# Altium PCB Board_v1.2.PcbDoc
Units mm, origin at the board's own origin, x right, y up, seen from the top; angles counter-clockwise.
Board outline 50 x 30 mm, 4 copper layers (Top Layer, Int1 (signal), Int2 (GND), Bottom Layer), stack 1.369 mm thick; 76 components, 45 nets, 255 pads, 194 vias.
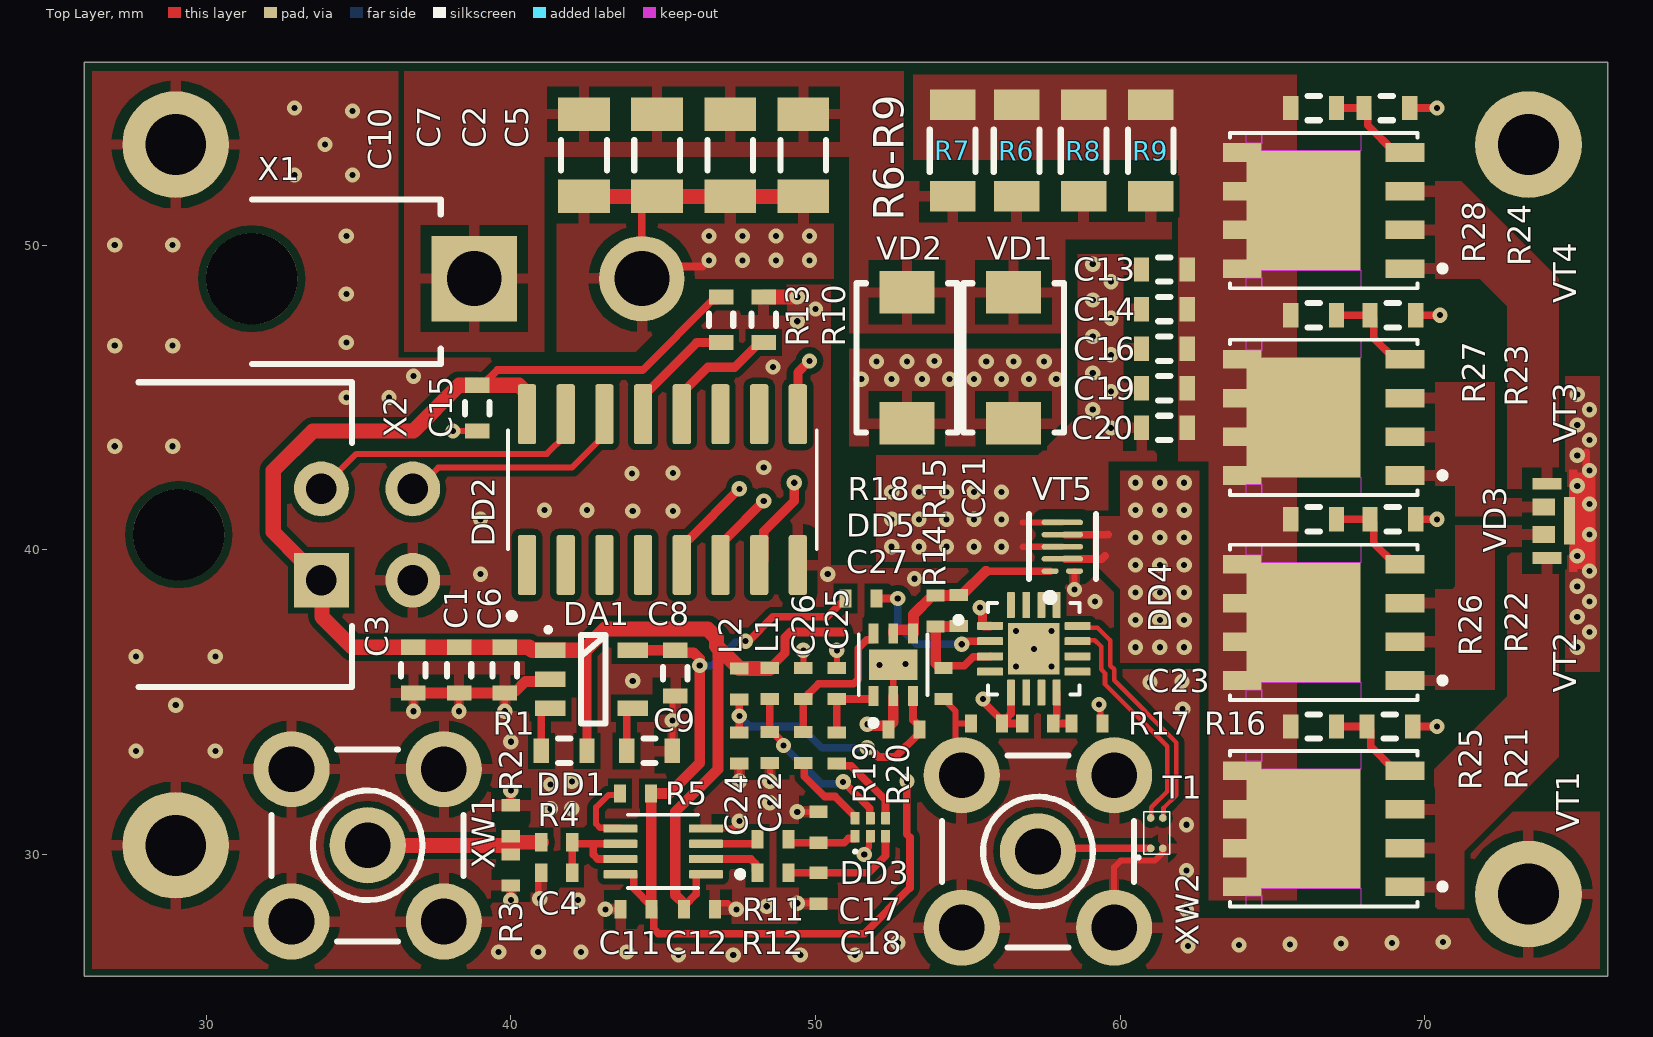
[diagram p0: Top Layer view]
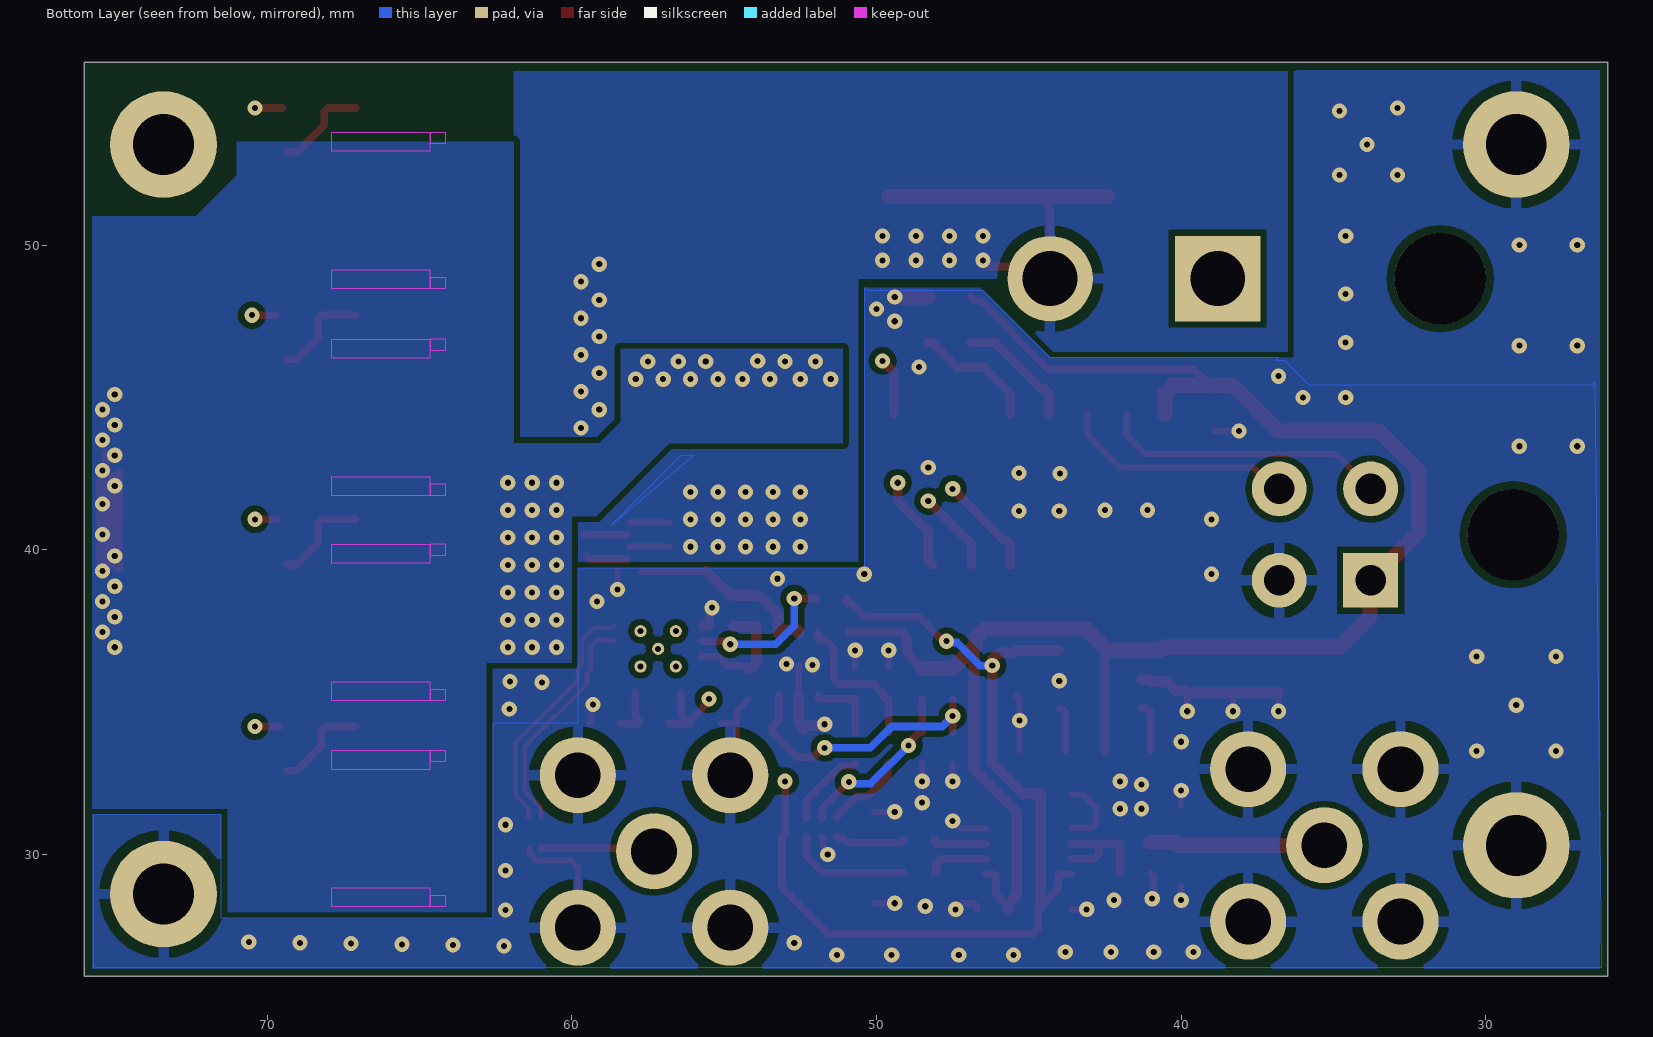
[diagram p1: Bottom Layer view, seen from below]
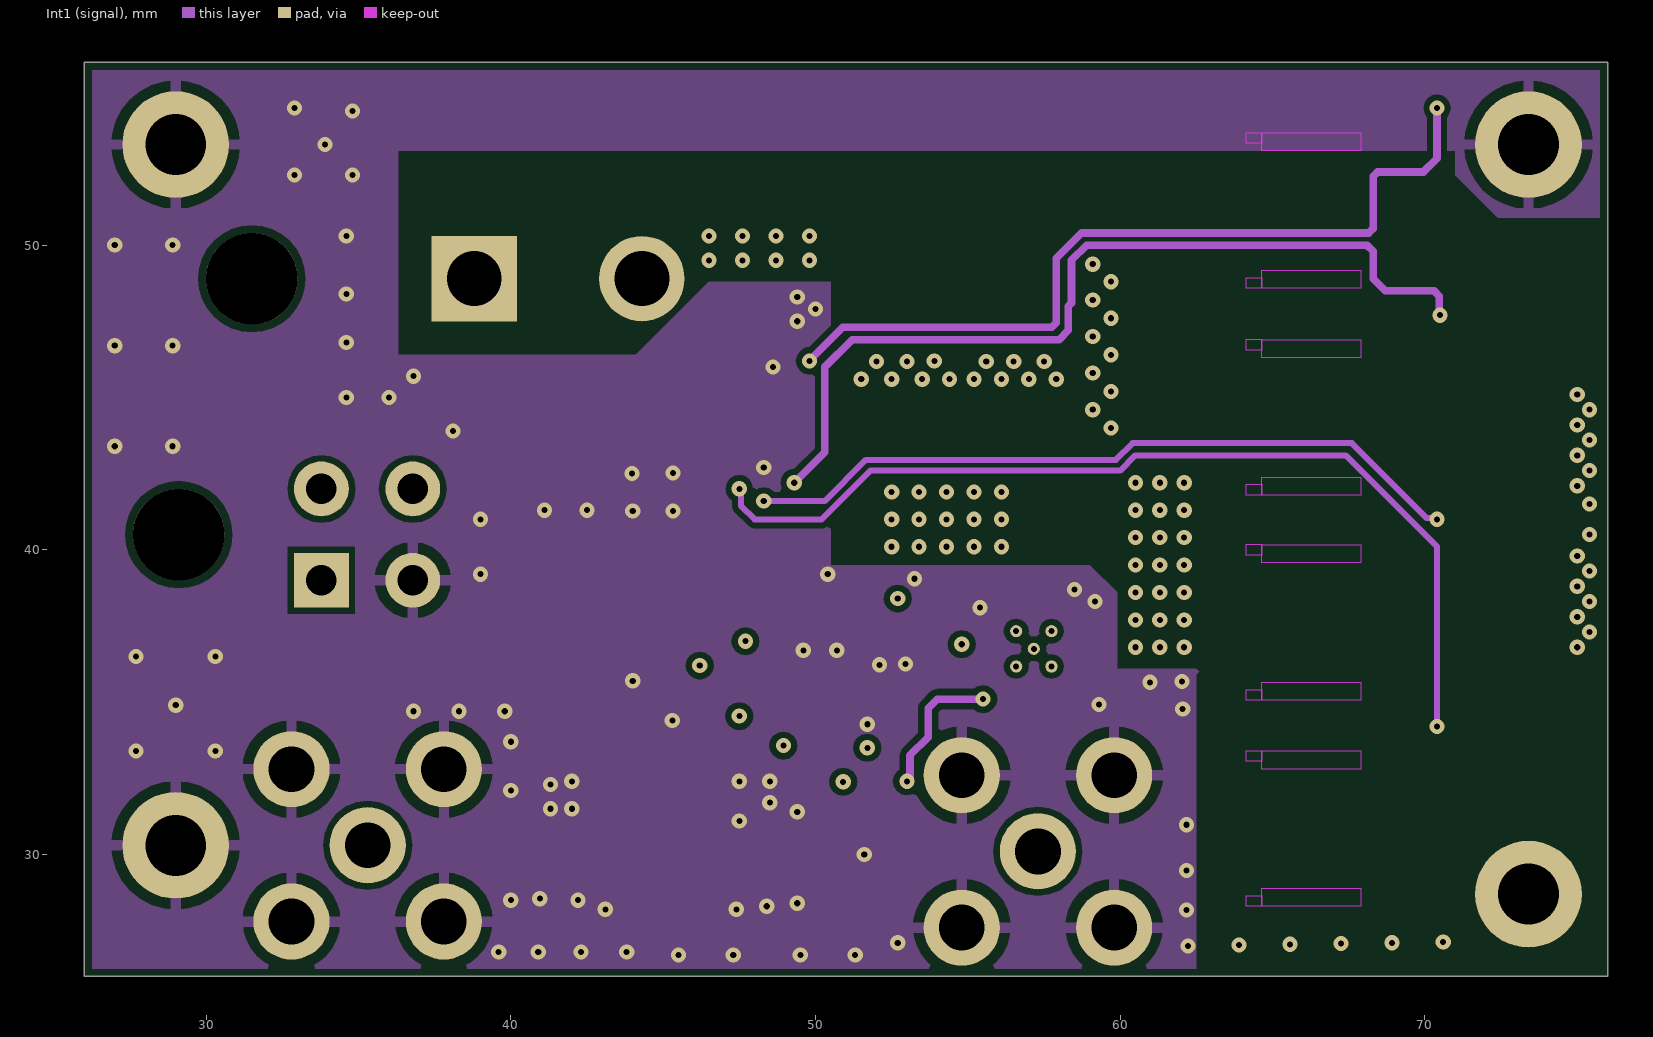
[diagram p2: Int1 (signal)]
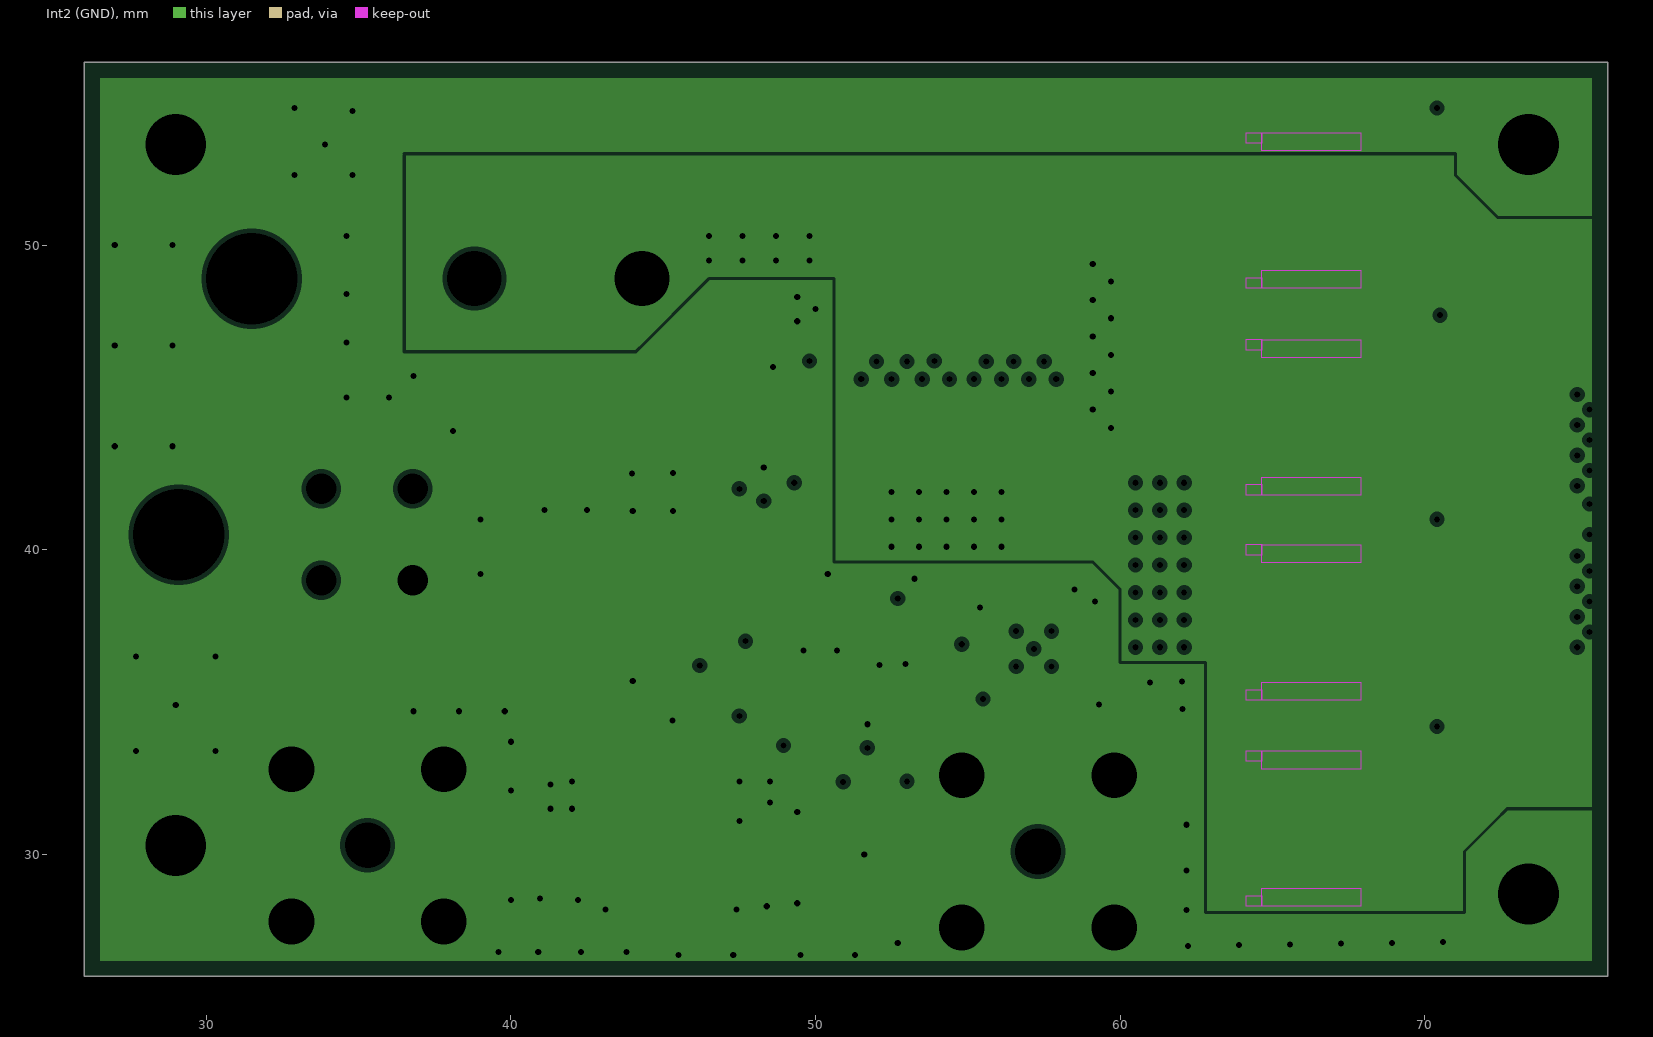
[diagram p3: Int2 (GND), clearances drawn from the general rule]
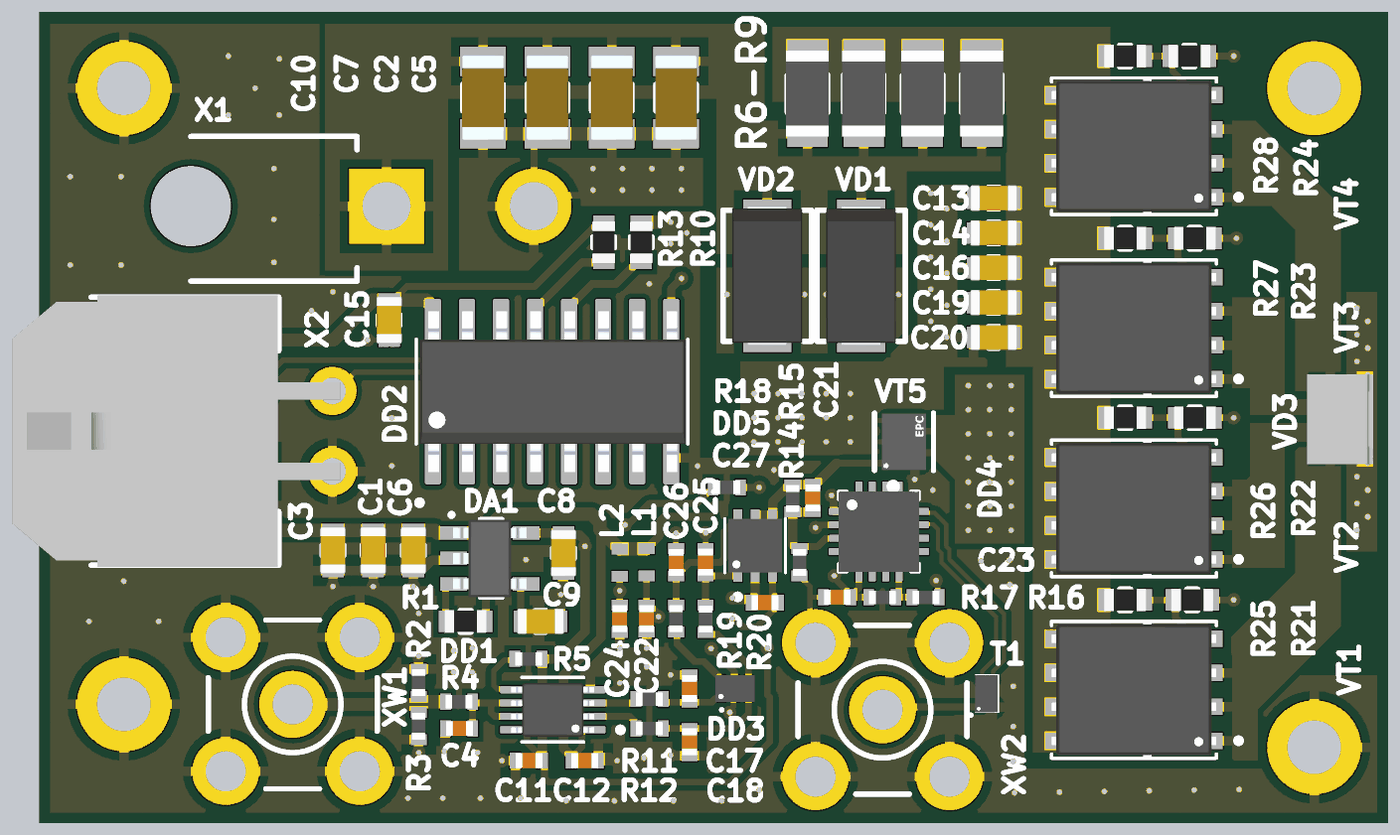
[diagram p4: 3D render of the assembled board from above, using the file's embedded part models]

## Layer stack, top to bottom
Top Solder: solder mask 0.0254, SM-001, Dk 4
Top Layer: signal copper 0.035
Dielectric 1: prepreg 0.1295, PP-017, Dk 4.3
Dielectric 2: prepreg 0.1295, PP-017, Dk 4.3
Int1 (signal): signal copper 0.035
Dielectric 3: core 0.7112, Core-039, Dk 4.8
Int2 (GND): plane copper 0.035, net (Multiple Nets)
Dielectric 4: prepreg 0.1295, PP-017, Dk 4.3
Dielectric 5: prepreg 0.1295, PP-017, Dk 4.3
Bottom Layer: signal copper 0.035
Bottom Solder: solder mask 0.0254, SM-001, Dk 4

## Board outline
26,26 76,26 76,56 26,56

## Design rules (kind name [scope] priority, off if disabled: settings)
AcuteAngle [All] p1: minimum=3.50000000000000E+0001 checktracksonly=FALSE
BoardOutlineClearance "BoardOutlineClearance 1" [All] p1: gap=0.25 ignorepadtopadclearanceinfootprint=FALSE except(0: Arc-SplitContinuation Track-SplitContinuation SMDPad-SplitContinuation THPad-SplitContinuation Via-SplitContinuation Fill-SplitContinuation Poly-SplitContinuation Region-SplitContinuation Text-SplitContinuation) // Milling
BoardOutlineClearance "BoardOutlineClearance 2" [All] p2: gap=0.4 ignorepadtopadclearanceinfootprint=FALSE except(0: Arc-SplitContinuation Track-SplitContinuation SMDPad-SplitContinuation THPad-SplitContinuation Via-SplitContinuation Fill-SplitContinuation Poly-SplitContinuation Region-SplitContinuation Text-SplitContinuation) // V-Cut
Clearance "Clearance-1 1 Oz" [All] p1 off: gap=0.2 ignorepadtopadclearanceinfootprint=FALSE except(0.25: Arc-Hole Track-Hole SMDPad-Hole THPad-Hole Via-Hole Fill-Hole Poly-Hole Region-Hole Text-Hole) // Standart
Clearance "Clearance 3 Oz" [All] p2 off: gap=0.35 ignorepadtopadclearanceinfootprint=FALSE except(0.25: Arc-Hole Track-Hole SMDPad-Hole THPad-Hole Via-Hole Fill-Hole Poly-Hole Region-Hole Text-Hole)
Clearance "Clearance 2 Oz" [All] p3 off: gap=0.3 ignorepadtopadclearanceinfootprint=FALSE except(0.25: Arc-Hole Track-Hole SMDPad-Hole THPad-Hole Via-Hole Fill-Hole Poly-Hole Region-Hole Text-Hole)
Clearance "Clearance-2 1 Oz" [All] p4: gap=0.15 ignorepadtopadclearanceinfootprint=FALSE except(0.2: Arc-Fill Arc-Poly Track-Fill Track-Poly SMDPad-Fill SMDPad-Poly THPad-Fill THPad-Poly Via-Fill Via-Poly Fill-Fill Fill-Poly Poly-Poly; 0.25: Arc-Hole Track-Hole SMDPad-Hole THPad-Hole Via-Hole Fill-Hole Poly-Hole Region-Hole Text-Hole) // Advance
Clearance "Clearance-1 1/2 Oz" [All] p5: gap=0.125 ignorepadtopadclearanceinfootprint=FALSE except(0.2: Arc-Fill Arc-Poly Track-Fill Track-Poly SMDPad-SMDPad SMDPad-Fill SMDPad-Poly THPad-Fill THPad-Poly Via-Fill Via-Poly Fill-Fill Fill-Poly Poly-Poly Poly-Region Poly-Text; 0.25: Arc-Hole Track-Hole SMDPad-Hole THPad-Hole Via-Hole Fill-Hole Poly-Hole Region-Hole Text-Hole) // Standart
Clearance "Clearance-2 1/2 Oz" [All] p6: gap=0.1 ignorepadtopadclearanceinfootprint=FALSE except(0.15: Arc-Fill Arc-Poly Track-Fill Track-Poly SMDPad-SMDPad SMDPad-Fill SMDPad-Poly THPad-Fill THPad-Poly Via-Fill Via-Poly Fill-Fill Fill-Poly Poly-Poly Poly-Region Poly-Text; 0.25: Arc-Hole Track-Hole SMDPad-Hole THPad-Hole Via-Hole Fill-Hole Poly-Hole Region-Hole Text-Hole) // Advance
ComponentClearance [All] p1 off: gap=0.254 collisioncheckmode=3 verticalgap=0.254 showdistances=FALSE
DiffPairsRouting DiffPair_USBDiffPairsRouting [InDifferentialPair ('USB2_C_D') Or InDifferentialPair ('USB2_D') Or InDifferentialPair ('USB1_D') Or InDifferentialPair ('USB1_C_D')] p1: maxlimit=0.269 minlimit=0.15 mostfreqgap=0.178 toplayer_maxgap=0.254 toplayer_prefgap=0.15 toplayer_minwidth=0.15 toplayer_maxwidth=0.381 toplayer_prefwidth=0.187 midlayer1_mingap=0.163 midlayer1_minwidth=0.15 midlayer1_maxwidth=0.381 midlayer1_prefwidth=0.15 bottomlayer_maxgap=0.254 bottomlayer_prefgap=0.15 bottomlayer_minwidth=0.167 bottomlayer_maxwidth=0.381 bottomlayer_prefwidth=0.187 impedanceprofiledriven=TRUE maxuncoupledlength=12.7
DiffPairsRouting DiffPair_GbEthDiffPairsRouting [InDifferentialPair ('PCIE0_TX0') Or InDifferentialPair ('PCIE0_TX1') Or InDifferentialPair ('PCIE0_RX2') Or InDifferentialPair ('PCIE0_RX3') Or InDifferentialPair ('PCIE0_RX0') Or InDifferentialPair ('PCIE0_RX1') Or InDifferentialPair ('C_PCIE0_TX3') Or InDifferentialPair ('PCIE0_CLK') Or InDifferentialPair ('C_PCIE0_TX1') Or InDifferentialPair ('C_PCIE0_TX2') Or InDifferentialPair ('C_PCIE0_TX0') Or InDifferentialPair ('PCIE0_TX2') Or InDifferentialPair ('PCIE0_TX3')] p2: maxlimit=0.269 minlimit=0.15 mostfreqgap=0.15 toplayer_maxgap=0.254 toplayer_minwidth=0.15 toplayer_maxwidth=0.381 toplayer_prefwidth=0.235 midlayer1_minwidth=0.15 midlayer1_maxwidth=0.381 midlayer1_prefwidth=0.183 bottomlayer_maxgap=0.254 bottomlayer_minwidth=0.167 bottomlayer_maxwidth=0.381 bottomlayer_prefwidth=0.235 impedanceprofiledriven=TRUE maxuncoupledlength=12.7
DiffPairsRouting DiffPair_PCIeDiffPairsRouting [InDifferentialPair ('PCIE0_TX0') Or InDifferentialPair ('PCIE0_TX1') Or InDifferentialPair ('PCIE0_RX1') Or InDifferentialPair ('PCIE0_RX0') Or InDifferentialPair ('PCIE0_TX3') Or InDifferentialPair ('PCIE0_RX2') Or InDifferentialPair ('PCIE0_CLK') Or InDifferentialPair ('PCIE0_TX2') Or InDifferentialPair ('PCIE0_RX3')] p3: maxlimit=0.269 minlimit=0.15 mostfreqgap=0.15 toplayer_maxgap=0.254 toplayer_minwidth=0.15 toplayer_maxwidth=0.381 toplayer_prefwidth=0.235 midlayer1_minwidth=0.15 midlayer1_maxwidth=0.381 midlayer1_prefwidth=0.183 bottomlayer_maxgap=0.254 bottomlayer_minwidth=0.15 bottomlayer_maxwidth=0.381 bottomlayer_prefwidth=0.235 impedanceprofiledriven=TRUE maxuncoupledlength=12.7
DiffPairsRouting DiffPair_CSI_2DiffPairsRouting [InDifferentialPair ('CSI_E_CLK') Or InDifferentialPair ('CSI_E_D1') Or InDifferentialPair ('CSI_F_D0') Or InDifferentialPair ('CSI_F_D1') Or InDifferentialPair ('CSI_E_D0')] p4: maxlimit=0.254 minlimit=0.15 mostfreqgap=0.178 toplayer_prefgap=0.15 toplayer_minwidth=0.125 toplayer_maxwidth=0.381 toplayer_prefwidth=0.187 midlayer1_minwidth=0.098 midlayer1_maxwidth=0.381 midlayer1_prefwidth=0.15 bottomlayer_prefgap=0.15 bottomlayer_minwidth=0.125 bottomlayer_maxwidth=0.381 bottomlayer_prefwidth=0.187 impedanceprofiledriven=TRUE maxuncoupledlength=12.7
DiffPairsRouting DiffPair_CSI_1DiffPairsRouting [InDifferentialPair ('CSI_A_D0') Or InDifferentialPair ('CSI_B_D1') Or InDifferentialPair ('CSI_A_CLK') Or InDifferentialPair ('CSI_A_D1') Or InDifferentialPair ('CSI_B_D0')] p5: maxlimit=0.254 minlimit=0.15 mostfreqgap=0.178 toplayer_prefgap=0.15 toplayer_minwidth=0.15 toplayer_maxwidth=0.381 toplayer_prefwidth=0.187 midlayer1_minwidth=0.15 midlayer1_maxwidth=0.381 midlayer1_prefwidth=0.15 bottomlayer_prefgap=0.15 bottomlayer_minwidth=0.15 bottomlayer_maxwidth=0.381 bottomlayer_prefwidth=0.187 impedanceprofiledriven=TRUE maxuncoupledlength=12.7
DiffPairsRouting DiffPair_GbEDiffPairsRouting [InDifferentialPairClass('GbE')] p6: maxlimit=0.269 minlimit=0.15 mostfreqgap=0.221 toplayer_maxgap=0.254 toplayer_prefgap=0.206 toplayer_minwidth=0.15 toplayer_maxwidth=0.381 toplayer_prefwidth=0.15 midlayer1_minwidth=0.15 midlayer1_maxwidth=0.381 midlayer1_prefwidth=0.15 bottomlayer_maxgap=0.254 bottomlayer_prefgap=0.15 bottomlayer_minwidth=0.15 bottomlayer_maxwidth=0.381 bottomlayer_prefwidth=0.167 impedanceprofiledriven=TRUE maxuncoupledlength=12.7
DiffPairsRouting DiffPair_TMDS_1DiffPairsRouting [InDifferentialPair ('TMDS_D0_C') Or InDifferentialPair ('TMDS_D1_C') Or InDifferentialPair ('TMDS_D2_C') Or InDifferentialPair ('TMDS_CLK_C')] p7: maxlimit=0.269 minlimit=0.15 mostfreqgap=0.221 toplayer_maxgap=0.254 toplayer_prefgap=0.206 toplayer_minwidth=0.15 toplayer_maxwidth=0.381 toplayer_prefwidth=0.15 midlayer1_minwidth=0.15 midlayer1_maxwidth=0.381 midlayer1_prefwidth=0.15 bottomlayer_maxgap=0.254 bottomlayer_prefgap=0.15 bottomlayer_minwidth=0.15 bottomlayer_maxwidth=0.381 bottomlayer_prefwidth=0.167 impedanceprofiledriven=TRUE maxuncoupledlength=12.7
DiffPairsRouting CSI [InDifferentialPairClass('CSI')] p8: maxlimit=0.254 minlimit=0.15 mostfreqgap=0.178 toplayer_prefgap=0.15 toplayer_minwidth=0.187 toplayer_maxwidth=0.381 toplayer_prefwidth=0.187 midlayer1_minwidth=0.117 midlayer1_maxwidth=0.381 midlayer1_prefwidth=0.15 bottomlayer_prefgap=0.15 bottomlayer_minwidth=0.187 bottomlayer_maxwidth=0.381 bottomlayer_prefwidth=0.187 impedanceprofiledriven=TRUE maxuncoupledlength=12.7
DiffPairsRouting GBE [InDifferentialPairClass('GbE')] p9: maxlimit=0.269 minlimit=0.15 mostfreqgap=0.221 toplayer_maxgap=0.254 toplayer_prefgap=0.206 toplayer_minwidth=0.125 toplayer_maxwidth=0.381 toplayer_prefwidth=0.15 midlayer1_minwidth=0.098 midlayer1_maxwidth=0.381 midlayer1_prefwidth=0.15 bottomlayer_maxgap=0.254 bottomlayer_prefgap=0.15 bottomlayer_minwidth=0.125 bottomlayer_maxwidth=0.381 bottomlayer_prefwidth=0.167 impedanceprofiledriven=TRUE maxuncoupledlength=12.7
DiffPairsRouting TMDS [InDifferentialPairClass('TMDS')] p10: maxlimit=0.269 minlimit=0.127 mostfreqgap=0.221 toplayer_maxgap=0.254 toplayer_prefgap=0.206 toplayer_minwidth=0.125 toplayer_maxwidth=0.381 toplayer_prefwidth=0.15 midlayer1_minwidth=0.07 midlayer1_maxwidth=0.381 midlayer1_prefwidth=0.15 bottomlayer_maxgap=0.254 bottomlayer_prefgap=0.15 bottomlayer_minwidth=0.125 bottomlayer_maxwidth=0.381 bottomlayer_prefwidth=0.167 impedanceprofiledriven=TRUE maxuncoupledlength=12.7
DiffPairsRouting "DiffPairsRouting 1 Oz" [All] p11 off: maxlimit=0.254 minlimit=0.2 mostfreqgap=0.254 toplayer_minwidth=0.2 toplayer_maxwidth=0.381 toplayer_prefwidth=0.381 midlayer1_minwidth=0.2 midlayer1_maxwidth=0.381 midlayer1_prefwidth=0.381 bottomlayer_minwidth=0.2 bottomlayer_maxwidth=0.381 bottomlayer_prefwidth=0.381 maxuncoupledlength=12.7
DiffPairsRouting "DiffPairsRouting 1/2 Oz" [All] p12 off: maxlimit=0.254 minlimit=0.1 mostfreqgap=0.254 toplayer_minwidth=0.1 toplayer_maxwidth=0.381 toplayer_prefwidth=0.381 midlayer1_minwidth=0.1 midlayer1_maxwidth=0.381 midlayer1_prefwidth=0.381 bottomlayer_minwidth=0.1 bottomlayer_maxwidth=0.381 bottomlayer_prefwidth=0.381 maxuncoupledlength=12.7
HoleSize "Minimum HoleSize" [IsPad] p1: absolutevalues=TRUE maxlimit=5.9 minlimit=0.6 maxpercent=80.000 minpercent=20.000
HoleSize "Minimum HoleSize VIA 1" [IsVia] p2: absolutevalues=TRUE maxlimit=5.9 minlimit=0.3 maxpercent=80.000 minpercent=20.000 // Standart
HoleSize "Minimum HoleSize VIA 2" [IsVia] p3: absolutevalues=TRUE maxlimit=5.9 minlimit=0.2 maxpercent=80.000 minpercent=20.000 // Advance
HoleToHoleClearance Hole2HoleClearance [All] p1: gap=0.25 allowstackedmicrovias=FALSE
MatchedLengths DiffPair_USBMatchedLengths [InDifferentialPair ('USB2_C_D') Or InDifferentialPair ('USB2_D') Or InDifferentialPair ('USB1_D') Or InDifferentialPair ('USB1_C_D')] p1: tolerance=0.65 checknetsindiffpair=FALSE checkdiffpairvsdiffpair=TRUE checkxsignals=TRUE checkothers=TRUE
MatchedLengths DiffPair_GbEthMatchedLengths [InDifferentialPair ('PCIE0_TX0') Or InDifferentialPair ('PCIE0_TX1') Or InDifferentialPair ('PCIE0_RX2') Or InDifferentialPair ('PCIE0_RX3') Or InDifferentialPair ('PCIE0_RX0') Or InDifferentialPair ('PCIE0_RX1') Or InDifferentialPair ('C_PCIE0_TX3') Or InDifferentialPair ('PCIE0_CLK') Or InDifferentialPair ('C_PCIE0_TX1') Or InDifferentialPair ('C_PCIE0_TX2') Or InDifferentialPair ('C_PCIE0_TX0') Or InDifferentialPair ('PCIE0_TX2') Or InDifferentialPair ('PCIE0_TX3')] p2: tolerance=1 checknetsindiffpair=FALSE checkdiffpairvsdiffpair=TRUE checkxsignals=TRUE checkothers=TRUE
MatchedLengths DiffPair_PCIeMatchedLengths [InDifferentialPair ('PCIE0_TX0') Or InDifferentialPair ('PCIE0_TX1') Or InDifferentialPair ('PCIE0_RX1') Or InDifferentialPair ('PCIE0_RX0') Or InDifferentialPair ('PCIE0_TX3') Or InDifferentialPair ('PCIE0_RX2') Or InDifferentialPair ('PCIE0_CLK') Or InDifferentialPair ('PCIE0_TX2') Or InDifferentialPair ('PCIE0_RX3')] p3: tolerance=1 checknetsindiffpair=FALSE checkdiffpairvsdiffpair=TRUE checkxsignals=TRUE checkothers=TRUE
MatchedLengths DiffPair_CSI_2MatchedLengths [InDifferentialPair ('CSI_E_CLK') Or InDifferentialPair ('CSI_E_D1') Or InDifferentialPair ('CSI_F_D0') Or InDifferentialPair ('CSI_F_D1') Or InDifferentialPair ('CSI_E_D0')] p4: tolerance=1 checknetsindiffpair=FALSE checkdiffpairvsdiffpair=TRUE checkxsignals=TRUE checkothers=TRUE
MatchedLengths DiffPair_CSI_1MatchedLengths [InDifferentialPair ('CSI_A_D0') Or InDifferentialPair ('CSI_B_D1') Or InDifferentialPair ('CSI_A_CLK') Or InDifferentialPair ('CSI_A_D1') Or InDifferentialPair ('CSI_B_D0')] p5: tolerance=1 checknetsindiffpair=FALSE checkdiffpairvsdiffpair=TRUE checkxsignals=TRUE checkothers=TRUE
MatchedLengths DiffPair_GbEMatchedLengths [InDifferentialPairClass('GbE')] p6: tolerance=1 checknetsindiffpair=FALSE checkdiffpairvsdiffpair=TRUE checkxsignals=TRUE checkothers=TRUE
MatchedLengths DiffPair_TMDS_1MatchedLengths [InDifferentialPair ('TMDS_D0_C') Or InDifferentialPair ('TMDS_D1_C') Or InDifferentialPair ('TMDS_D2_C') Or InDifferentialPair ('TMDS_CLK_C')] p7: tolerance=1 checknetsindiffpair=FALSE checkdiffpairvsdiffpair=TRUE checkxsignals=TRUE checkothers=TRUE
MatchedLengths DiffPair_MatchedLengths [InDifferentialPair ('TMDS_CLK') Or InDifferentialPair ('TMDS_D0') Or InDifferentialPair ('TMDS_D1') Or InDifferentialPair ('TMDS_D2')] p8: tolerance=1 checknetsindiffpair=FALSE checkdiffpairvsdiffpair=TRUE checkxsignals=TRUE checkothers=TRUE
MatchedLengths [InDifferentialPairClass('TMDS')] p9: tolerance=1 checknetsindiffpair=FALSE checkdiffpairvsdiffpair=TRUE checkxsignals=TRUE checkothers=TRUE
MatchedLengths MatchedLengths_InParirs [All] p10: tolerance=0.1 checknetsindiffpair=TRUE checkdiffpairvsdiffpair=FALSE checkxsignals=FALSE checkothers=FALSE
MatchedLengths MatchedLengths_BetweenPairs [InDifferentialPairClass('GbE')] p11: tolerance=1 checknetsindiffpair=FALSE checkdiffpairvsdiffpair=TRUE checkxsignals=TRUE checkothers=TRUE
MinimumAnnularRing "Minimum AR VIA Standart" [IsVia] p1: minimumring=0.15
MinimumAnnularRing "Minimum AR PAD Standart" [IsPAD] p2: minimumring=0.2
MinimumAnnularRing "Minimum AR VIA Advance" [IsVia] p3: minimumring=0.1
MinimumAnnularRing "Minimum AR PAD Advance" [IsPAD] p4: minimumring=0.15
MinimumSolderMaskSliver "SolderMask Bridge Standart" [All] p1: minsoldermaskwidth=0.15 // All Masks
MinimumSolderMaskSliver "SolderMask Bridge Advance" [All] p2: minsoldermaskwidth=0.1 // Mask LDI
PlaneClearance "PlaneClearance 3 Oz" [All] p1: clearance=0.35
PlaneClearance "PlaneClearance 2 Oz" [All] p2: clearance=0.3
PlaneClearance "PlaneClearance 1 Oz" [All] p3: clearance=0.2
PlaneClearance "PlaneClearance-1 1/2 Oz" [All] p4: clearance=0.2 // Standart
PlaneClearance "PlaneClearance-2 1/2 Oz" [All] p5: clearance=0.15 // Advance
PlaneConnect "TermalConnect 3 Oz" [All] p1: planeconnectstyle=Relief reliefexpansion=0.2 reliefentries=4 reliefconductorwidth=0.35 reliefairgap=0.35 // Standart
PlaneConnect "TermalConnect 2 Oz" [All] p2: planeconnectstyle=Relief reliefexpansion=0.2 reliefentries=4 reliefconductorwidth=0.3 reliefairgap=0.3 // Standart
PlaneConnect "TermalConnect-1 1 Oz" [All] p3: planeconnectstyle=Relief reliefexpansion=0.2 reliefentries=4 reliefconductorwidth=0.2 reliefairgap=0.2 // Standart
PlaneConnect "TermalConnect-2 1 Oz" [All] p4: pad.planeconnectstyle=Relief pad.reliefexpansion=0.15 pad.reliefentries=4 pad.reliefconductorwidth=0.2 pad.reliefairgap=0.2 via.planeconnectstyle=Direct via.reliefexpansion=0.15 via.reliefentries=4 via.reliefconductorwidth=0.15 via.reliefairgap=0.15 // Advance
PlaneConnect "TermalConnect-1 1/2 Oz" [All] p5: planeconnectstyle=Relief reliefexpansion=0.2 reliefentries=4 reliefconductorwidth=0.2 reliefairgap=0.2 // Standart
PlaneConnect "TermalConnect-2 1/2 Oz" [All] p6: pad.planeconnectstyle=Relief pad.reliefexpansion=0.15 pad.reliefentries=4 pad.reliefconductorwidth=0.15 pad.reliefairgap=0.15 via.planeconnectstyle=Direct via.reliefexpansion=0.15 via.reliefentries=4 via.reliefconductorwidth=0.15 via.reliefairgap=0.15 // Advance
PolygonConnect PolygonConnect_charge [InNet('NetC13_1')] p1: connectstyle=Direct reliefconductorwidth=0.254 reliefentries=4 polygonreliefangle="90 Angle" airgapwidth=0.254
PolygonConnect "PolygonConnect 3 Oz" [All] p2: thpad.connectstyle=Relief thpad.reliefconductorwidth=0.35 thpad.reliefentries=4 thpad.polygonreliefangle="90 Angle" thpad.airgapwidth=0.35 smdpad.connectstyle=Relief smdpad.reliefconductorwidth=0.35 smdpad.reliefentries=4 smdpad.polygonreliefangle="90 Angle" smdpad.airgapwidth=0.35 via.connectstyle=Direct via.reliefconductorwidth=0.254 via.reliefentries=4 via.polygonreliefangle="90 Angle" via.airgapwidth=0.254
PolygonConnect "PolygonConnect 2 Oz" [All] p3: thpad.connectstyle=Relief thpad.reliefconductorwidth=0.3 thpad.reliefentries=4 thpad.polygonreliefangle="90 Angle" thpad.airgapwidth=0.3 smdpad.connectstyle=Relief smdpad.reliefconductorwidth=0.3 smdpad.reliefentries=4 smdpad.polygonreliefangle="90 Angle" smdpad.airgapwidth=0.3 via.connectstyle=Direct via.reliefconductorwidth=0.254 via.reliefentries=4 via.polygonreliefangle="90 Angle" via.airgapwidth=0.254
PolygonConnect "PolygonConnect-1 1 Oz" [All] p4: thpad.connectstyle=Relief thpad.reliefconductorwidth=0.2 thpad.reliefentries=4 thpad.polygonreliefangle="90 Angle" thpad.airgapwidth=0.2 smdpad.connectstyle=Relief smdpad.reliefconductorwidth=0.2 smdpad.reliefentries=4 smdpad.polygonreliefangle="90 Angle" smdpad.airgapwidth=0.2 via.connectstyle=Direct via.reliefconductorwidth=0.254 via.reliefentries=4 via.polygonreliefangle="90 Angle" via.airgapwidth=0.254 // Standart
PolygonConnect "PolygonConnect-2 1 Oz" [All] p5: thpad.connectstyle=Relief thpad.reliefconductorwidth=0.15 thpad.reliefentries=4 thpad.polygonreliefangle="90 Angle" thpad.airgapwidth=0.15 smdpad.connectstyle=Relief smdpad.reliefconductorwidth=0.15 smdpad.reliefentries=4 smdpad.polygonreliefangle="90 Angle" smdpad.airgapwidth=0.15 via.connectstyle=Direct via.reliefconductorwidth=0.254 via.reliefentries=4 via.polygonreliefangle="90 Angle" via.airgapwidth=0.254 // Advance
PolygonConnect "PolygonConnect-1 1/2 Oz" [All] p6: thpad.connectstyle=Relief thpad.reliefconductorwidth=0.15 thpad.reliefentries=4 thpad.polygonreliefangle="90 Angle" thpad.airgapwidth=0.2 smdpad.connectstyle=Relief smdpad.reliefconductorwidth=0.2 smdpad.reliefentries=4 smdpad.polygonreliefangle="90 Angle" smdpad.airgapwidth=0.2 via.connectstyle=Direct via.reliefconductorwidth=0.254 via.reliefentries=4 via.polygonreliefangle="90 Angle" via.airgapwidth=0.254 // Standart
PolygonConnect "PolygonConnect-2 1/2 Oz" [All] p7: thpad.connectstyle=Relief thpad.reliefconductorwidth=0.125 thpad.reliefentries=4 thpad.polygonreliefangle="90 Angle" thpad.airgapwidth=0.15 smdpad.connectstyle=Relief smdpad.reliefconductorwidth=0.125 smdpad.reliefentries=4 smdpad.polygonreliefangle="90 Angle" smdpad.airgapwidth=0.15 via.connectstyle=Direct via.reliefconductorwidth=0.254 via.reliefentries=4 via.polygonreliefangle="90 Angle" via.airgapwidth=0.254 // Advance
RoutingCorners [All] p1 off: cornerstyle=45-Degree minsetback=2.54 maxsetback=2.54
RoutingVias [All] p1: holewidth=0.3 width=0.6 viastyle="Through Hole" minholewidth=0.2 minwidth=0.4 maxholewidth=5.9 maxwidth=6.4 useviatemplates=TRUE viatemplateguid#1={F08396B5-E34C-4550-AAD9-3DB8EBE455C9} viatemplatename#1=v50h20m0mx0
SilkToSilkClearance Silk2SilkClearance [All] p1 off: silktosilkclearance=0.15
SilkToSolderMaskClearance Silk2SolderMaskClearance [IsPad] p1 off: minsilkscreentomaskgap=0.15 clearancetoexposedcopper=TRUE
SolderMaskExpansion SolderMaskExpansion-1 [All] p1: expansion=0.05 istentingtop=FALSE // Standart
SolderMaskExpansion "SolderMaskExpansion LDI" [All] p2: expansion=0.025 istentingtop=FALSE // Advance
UnRoutedNet [All] p1: checkbadconnections=TRUE
Width Z_50 [InNetClass('Z_50')] p1: maxlimit=2.798 minlimit=0.254 preferedwidth=0.489 impedanceprofiledriven=TRUE minimp=50.000000 maximp=50.000000 favimp=50.000000
Width "Width 1 Oz" [All] p2: maxlimit=10 minlimit=0.15 preferedwidth=0.2 toplayer_maxwidth=5 bottomlayer_maxwidth=5 minimp=50.000000 maximp=50.000000 favimp=50.000000 checkconnectedcopper=TRUE
Width "Width 3 Oz" [All] p3: maxlimit=10 minlimit=0.35 preferedwidth=0.4 checkconnectedcopper=TRUE
Width "Width 2 Oz" [All] p4: maxlimit=10 minlimit=0.3 preferedwidth=0.35 minimp=50.000000 maximp=50.000000 favimp=50.000000 checkconnectedcopper=TRUE
Width "Width 1/2 Oz" [All] p5: maxlimit=10 minlimit=0.1 preferedwidth=0.125 checkconnectedcopper=TRUE
19 further rules are at their usual default settings.

## Classes and differential pairs
differential pair class Z_100: OUT
net class Z_50: NetR2_2 NetT1_A1
component class main: C1 C2 C3 C4 C5 C6 C7 C8 C9 C10 C11 C12 C13 C14 C15 C16 C17 C18 C19 C20 C22 C25 C27 DA1 DD1 DD2 DD3 DD4 DD5 L1 L2 R1 R2 R3 R4 R5 R6 R7 R8 R9 R10 R11 R12 R13 R14 R15 R16 R18 R20 R21 R23 R26 R27 T1 VD1 VD2 VD3 VT1 VT2 VT3 VT4 VT5 X1 X2 XW1 XW2
differential pair OUT: +OUT_P -OUT_N

## Components (designator, comment, footprint, x,y, rotation, side; value= is the part's Value field where it differs from the comment)
C1 "1.0u; 50V; X7R;CAP-0603" CAP-0603 38.3,36.8 r270 top value=1.0u
C2 "1.0; 50V; X7R;CAP-1206_2" CAP-1206_2 47.2,54.3 r270 top value=1.0
C3 "10.0u; 50V; X7R;CAP-0603" CAP-0603 36.8,36.8 r270 top value=10.0u
C4 "5p; 50V; X7R;CAP-0402" CAP-0402 42.016,29.4 r180 top value=5p
C5 "1.0; 50V; X7R;CAP-1206_2" CAP-1206_2 49.6,54.3 r270 top value=1.0
C6 "0.1u; 50V; X7R;CAP-0603" CAP-0603 39.8,36.8 r270 top value=0.1u
C7 "1.0; 50V; X7R;CAP-1206_2" CAP-1206_2 44.8,54.3 r270 top value=1.0
C8 "2.2u; 50V; X7R;CAP-0603" CAP-0603 45.4,35.2 r90 top value=2.2u
C9 "0.01u; 50V; X7R;CAP-0603" CAP-0603 43.8,33.4 r0 top value=0.01u
C10 "1.0; 50V; X7R;CAP-1206_2" CAP-1206_2 42.4,54.3 r270 top value=1.0
C11 "0.1u; 50V; X7R;CAP-0402" CAP-0402 44.616,28.2 r180 top value=0.1u
C12 "0.1u; 50V; X7R;CAP-0402" CAP-0402 46.7,28.2 r180 top value=0.1u
C13 "470p; 50V; X7R;CAP-0603" CAP-0603 62.2,49.2 r180 top value=470p
C14 "470p; 50V; X7R;CAP-0603" CAP-0603 62.2,47.9 r180 top value=470p
C15 "0.01u; 50V; X7R;CAP-0603" CAP-0603 38.9,45.4 r270 top value=0.01u
C16 "470p; 50V; X7R;CAP-0603" CAP-0603 62.2,46.6 r180 top value=470p
C17 "8p; 50V; X7R;CAP-0402" CAP-0402 50.1,31.4 r270 top value=8p
C18 "8p; 50V; X7R;CAP-0402" CAP-0402 50.1,29.4 r270 top value=8p
C19 "470p; 50V; X7R;CAP-0603" CAP-0603 62.2,45.3 r180 top value=470p
C20 "470p; 50V; X7R;CAP-0603" CAP-0603 62.2,44 r180 top value=470p
C21 "5.1p; 50V; X7R;CAP-0402" CAP-0402 54.7,37.5 r90 top value=5.1p
C22 "0.1u; 50V; X7R;CAP-0402" CAP-0402 48.5,33 r90 top value=0.1u
C23 "0.1u; 50V; X7R;CAP-0402" CAP-0402 56.116,34.3 r180 top value=0.1u
C24 "0.1u; 50V; X7R;CAP-0402" CAP-0402 47.5,34 r270 top value=0.1u
C25 "5p; 50V; X7R;CAP-0402" CAP-0402 50.7,36.116 r270 top value=5p
C26 "5p; 50V; X7R;CAP-0402" CAP-0402 49.6,35.1 r90 top value=5p
C27 "0.1u; 50V; X7R;CAP-0402" CAP-0402 53.416,34.1 r180 top value=0.1u
DA1 "LP2985IM5-1.8" SOT23-5 42.65,35.75 r270 top
DD1 "SN74LVC2T45DCUR" SOP50P310X90-8N 45,30.1 r180 top
DD2 "SN74LS145D" SOIC127P600X175-16N 44.975,41.975 r90 top
DD3 "NC7WZ16L6X" PSON50P145X100X55-6N 51.8,30.895 r90 top
DD4 "LMK1D2102" QFN50P300X300X100-17N 57.165,36.75 r0 top
DD5 "LMG1025-Q1" SON65P200X200X80-7N 52.55,36.225 r90 top
L1 "330 Ohm" IND-0402 48.5,36.116 r270 top
L2 "330 Ohm" IND-0402 47.5,36.1 r270 top
R1 "5.1k" RES-0603 42.5,33.4 r180 top
R2 "100R" RES-0402 40,31.616 r270 top
R3 "100R" RES-0402 40,28.984 r90 top
R4 "10R" RES-0402 41,30.4 r0 top
R5 "2k" RES-0402 44.6,32 r180 top
R6 "3.3k" RES-1206 56.6,51.6 r90 top
R7 "3.3k" RES-1206 54.5,51.6 r90 top
R8 "3.3k" RES-1206 58.8,51.6 r90 top
R9 "3.3k" RES-1206 61,51.6 r90 top
R10 "10k" RES-0603 48.3,46.8 r90 top
R11 "100R" RES-0402 48.1,30.5 r0 top
R12 "200R" RES-0402 48.1,29.4 r0 top
R13 "10k" RES-0603 46.9,46.8 r90 top
R14 "1k2" RES-0402 54.2,35.1 r90 top
R15 "2k2" RES-0402 53.941,37.484 r90 top
R16 "1k" RES-0402 59.416,34.3 r180 top
R17 "1k" RES-0402 57.8,34.3 r180 top
R18 "510k" RES-0402 50.984,38.4 r0 top
R19 "10R" RES-0402 50.7,32.984 r90 top
R20 "10R" RES-0402 49.6,33 r90 top
R21 "10k" RES-0603 69.6,34.2 r180 top
R22 "10k" RES-0603 69.7,41 r180 top
R23 "10k" RES-0603 69.7,47.7 r180 top
R24 "10k" RES-0603 69.5,54.5 r180 top
R25 "10k" RES-0603 67.1,34.2 r180 top
R26 "10k" RES-0603 67.1,41 r180 top
R27 "10k" RES-0603 67.1,47.7 r180 top
R28 "10k" RES-0603 67.1,54.5 r180 top
T1 "BALF-NRG-01D3" FLIPCHIP 61.2,30.7 r90 top
VD1 "B360A-13-F" DIOD-SMA 56.5,46.3 r270 top
VD2 "B360A-13-F" DIOD-SMA 53,46.3 r270 top
VD3 "SPL_S4L90A_3_A01" SPL_S4L90A_3_A01 75.595,40.95 r270 top
VT1 "SI7145DP-T1-GE3" TRANS_FDMS0300 66.68,30.845 r180 top
VT2 "SI7145DP-T1-GE3" TRANS_FDMS0300 66.68,37.615 r180 top
VT3 "SI7145DP-T1-GE3" TRANS_FDMS0300 66.68,44.345 r180 top
VT4 "SI7145DP-T1-GE3" TRANS_FDMS0300 66.68,51.135 r180 top
VT5 "EPC2016C" EPC_2016C 58.1,40.103 r90 top
X1 "MINI-FIT-4.2-DRH-02" MINI-FIT-4.2-DRH-02 38.8,48.9 r270 top
X2 "MICRO-FIT-3.0-DRH-04" MICRO-FIT-3.0-DRH-04 33.78,39 r270 top
XW1 "SMB" SMB_V-RJ45 35.3,30.3 r0 top
XW2 "SMB" SMB_V-RJ45 57.3,30.1 r0 top

## Footprints (in the part's own frame and the unit in brackets; to place one, negate y for a bottom-side part, rotate by r counter-clockwise, add the part's x,y. Pads: shape width x height; smd on the part's side, far side on the other; paste and mask are expansions set on the pad)
CAP-0402 [mm]
  rect 0.4x0.6 smd: 1(0,0) 2(1.016,0)
  body extent 0,-0.28 1,0.28, height 0.25
CAP-0603 [mm]
  rect 0.5x0.8 smd: 1(0,0) 2(1.5,0)
  silkscreen extent 0.55,-0.4 0.95,0.4, body extent -0.13,-0.48 1.62,0.48, height 0.86
CAP-1206_2 [mm]
  rect 1.1x1.7 smd: 1(0,0) 2(2.7,0)
  silkscreen extent 0.85,-0.75 1.85,0.75, body extent -0.25,-0.8 2.95,0.8, height 0.88
DIOD-SMA [mm]
  rect 1.4x1.8 smd: 1(2.15,0) 2(-2.15,0)
  silkscreen extent -2.45,-1.65 2.45,1.65, body extent -2.6,-1.3 2.61,1.3, height 2.2
EPC_2016C [mm]
  rrect100% 0.18x0.56 smd paste-1000 mask-1000: 1(-0.803,0.401) 2(-0.803,-0.401)
  rrect100% 0.18x1.362 smd paste-1000 mask-1000: 3(-0.403,0) 4(-0.003,0) 5(0.397,0) 6(0.797,0)
  silkscreen extent -1.79,-1.1 1.07,1.1, body extent -1.17,-0.93 1.17,0.93, height 0.25
FLIPCHIP [mm]
  round 0.255 smd: A1(-0.5,0.2) A2(-0.5,-0.2) B1(0.5,0.2) B2(0.5,-0.2)
  silkscreen extent -0.85,-0.43 0.7,0.65, body extent -0.7,-0.4 0.7,0.45, height 0.68
IND-0402 [mm]
  rect 0.4x0.6 smd: 1(0,0) 2(1.016,0)
MICRO-FIT-3.0-DRH-04 [mm]
  rect 1.8x1.8 hole 1: 1(0,0)
  round 1.8 hole 1: 2(0,3) 3(-3,0) 4(-3,3)
  round 3 hole 3 unplated: 5(-1.5,-4.68)
  silkscreen extent -6.5,-6 3.5,1, body extent -6.57,-8.94 3.58,3.3, height 9.03
MINI-FIT-4.2-DRH-02 [mm]
  rect 2.8x2.8 hole 1.8: 1(0,0)
  round 2.8 hole 1.8: 2(0,5.5)
  round 3 hole 3 unplated: 3(0,-7.3)
  silkscreen extent -2.6,-7.3 2.8,-1.1
PSON50P145X100X55-6N [mm]
  rrect18% 0.41x0.3 smd: 1(-0.295,0.5) 2(-0.295,0) 3(-0.295,-0.5) 4(0.295,-0.5) 5(0.295,0) 6(0.295,0.5)
  silkscreen extent -0.8,0.5 -0.8,0.5, body extent -0.5,-0.73 0.5,0.72, height 0.55
QFN50P300X300X100-17N [mm]
  rrect25% 0.86x0.26 smd: 1(-1.435,0.75) 2(-1.435,0.25) 3(-1.435,-0.25) 4(-1.435,-0.75) 9(1.435,-0.75) 10(1.435,-0.25) 11(1.435,0.25) 12(1.435,0.75)
  rrect25% 0.26x0.86 smd: 5(-0.75,-1.435) 6(-0.25,-1.435) 7(0.25,-1.435) 8(0.75,-1.435) 13(0.75,1.435) 14(0.25,1.435) 15(-0.25,1.435) 16(-0.75,1.435)
  rect 1.68x1.68 smd paste-2: 17(0,0)
  round 0.4 hole 0.2 mask+0: 18(0,0) 19(-0.58,0.58) 20(0.58,0.58) 21(-0.58,-0.58) 22(0.58,-0.58)
  silkscreen extent -2.57,-1.5 1.5,1.5, body extent -1.5,-1.5 1.5,1.5, height 1
RES-0402 [mm]
  rect 0.4x0.6 smd: 1(0,0) 2(1.016,0)
  body extent 0,-0.25 1,0.25, height 0.4
RES-0603 [mm]
  rect 0.5x0.8 smd: 1(0,0) 2(1.5,0)
  silkscreen extent 0.55,-0.4 0.95,0.4, body extent -0.04,-0.42 1.54,0.43, height 0.5
RES-1206 [mm]
  rect 1x1.5 smd: 1(0,0) 2(3,0)
  silkscreen extent 0.8,-0.75 2.2,0.75, body extent -0.1,-0.8 3.1,0.8, height 0.65
SMB_V-RJ45 [mm] "Connector; SMB Straight"
  round 2.5 hole 1.5: 1(0,0) 2(-2.5,-2.5) 2(-2.5,2.5) 2(2.5,-2.5) 2(2.5,2.5)
  silkscreen extent -3.15,-3.15 3.15,3.15
SOIC127P600X175-16N [mm]
  rrect25% 1.97x0.6 smd: 1(-2.475,4.445) 2(-2.475,3.175) 3(-2.475,1.905) 4(-2.475,0.635) 5(-2.475,-0.635) 6(-2.475,-1.905) 7(-2.475,-3.175) 8(-2.475,-4.445) 9(2.475,-4.445) 10(2.475,-3.175) 11(2.475,-1.905) 12(2.475,-0.635) 13(2.475,0.635) 14(2.475,1.905) 15(2.475,3.175) 16(2.475,4.445)
  silkscreen extent -4.24,-5.06 1.95,5.06, body extent -3,-4.98 3,4.93, height 1.75
SON65P200X200X80-7N [mm]
  rect 0.66x0.32 smd: 1(-1.025,0.65) 2(-1.025,0) 3(-1.025,-0.65) 4(1.025,-0.65) 5(1.025,0) 6(1.025,0.65)
  rect 1x1.6 smd: 7(0,0)
  silkscreen extent -2.01,-1.13 1,1.13, body extent -1,-1 1,1, height 0.8
SOP50P310X90-8N [mm]
  rrect25% 1.12x0.27 smd: 1(-1.405,0.75) 2(-1.405,0.25) 3(-1.405,-0.25) 4(-1.405,-0.75) 5(1.405,-0.75) 6(1.405,-0.25) 7(1.405,0.25) 8(1.405,0.75)
  silkscreen extent -2.62,-1.2 1.15,1.2, body extent -1.55,-1 1.55,1, height 0.9
SOT23-5 [mm]
  rect 0.5x1 smd: 1(-0.95,-1.35) 2(0,-1.35) 3(0.95,-1.35) 4(0.95,1.35) 5(-0.95,1.35)
  silkscreen extent -1.65,-1.45 1.45,0.45, body extent -1.45,-1.38 1.45,1.38, height 1.2
SPL_S4L90A_3_A01 [mm]
  rect 0.385x0.95 smd: 1(-1.218,-1.59) 4(1.218,-1.59)
  rect 0.56x0.74 smd: 2(-0.45,-1.695) 3(0.45,-1.695)
  rect 1.55x0.375 smd: 5(0,-0.847)
  Top Layer region: 0,-0.847 -0.003,-0.85 -1.675,-0.85 -1.675,-0.6 -1.575,-0.6 -1.575,0 1.575,0 1.575,-0.6 1.675,-0.6 1.675,-0.85
  body extent -1.68,-2.45 1.67,0, height 0.68
TRANS_FDMS0300 [mm]
  rect 1.27x0.61 smd: 1(-2.67,-1.905) 2(-2.67,1.905) 2(-2.67,-0.635) 2(-2.67,0.635) 3(2.67,1.905) 3(2.67,-0.635) 3(2.67,0.635) 3(2.67,-1.905)
  rect 3.75x3.91 smd: 3(0.66,0)
  Keep-Out Layer region: 2.54,-2.562 2.036,-2.562 2.036,-2.21 2.54,-2.21
  Keep-Out Layer region: 2.035,-2.554 -1.217,-2.554 -1.217,-1.955 2.035,-1.955
  Keep-Out Layer region: 2.535,2.201 2.031,2.201 2.031,2.55 2.535,2.55
  Keep-Out Layer region: 2.035,1.958 -1.212,1.958 -1.212,2.55 2.035,2.55
  silkscreen extent -4,-2.55 3.08,2.55, body extent -3.07,-2.5 3.08,2.5, height 1.1

## Part data
C1 C3 C6 C8 C9 C13 C14 C15 C16 C19 C20: library part CAP, CurrentFootprint=CAP-0603, Dielectric=X7R, Voltage=50V, Vmin=50V
C2 C5 C7 C10: library part CAP, CurrentFootprint=CAP-1206_2, Dielectric=X7R, Voltage=50V, Vmin=50V
C4 C11 C12 C17 C18 C21 C22 C23 C24 C25 C26 C27: library part CAP, CurrentFootprint=CAP-0402, Dielectric=X7R, Voltage=50V, Vmin=50V
DD1: "2-Bit Dual Supply Transceiver with Configurable Voltage-Level Shifting and 3-State Outputs 8-VSSOP -40 to 85", Package="VSSOP-8 Texas Instruments", Availability=Warning, Check_prices=https://www.snapeda.com/parts/SN74LVC2T45DCUR/Texas%20Instruments/view-part/261570/?ref=eda, MF="Texas Instruments", MP=SN74LVC2T45DCUR, Price=None, Purchase-URL=https://pricing.snapeda.com/search/part/SN74LVC2T45DCUR/?ref=eda, SnapEDA_Link=https://www.snapeda.com/parts/SN74LVC2T45DCUR/Texas%20Instruments/view-part/261570/?ref=snap
DD2: Package=None, Availability=Unavailable, MP=SN74LS145D, Price=None
L1 L2: library part "Inductor 0603", Footprint path 1=IND-0603.Pcblib, Footprint path 2=IND-0603_2.Pcblib, Isat=700mA, Library path=IND.Schlib, Part Number="Inductor 0603"
R1 R2 R3 R4 R5 R6 R7 R8 R9 R10 R11 R12 R13 R14 R15 R16 R17 R18 R19 R20 R21 R22 R23 R24 R25 R26 R27 R28: library part "Resistor 0603", Footprint path 1=RES-0603.Pcblib, Footprint path 2=RES-0603_2.Pcblib, Library path=RES.Schlib, Part Number="Resistor 0603"
T1: "RF Balun 2.4GHz ~ 2.5GHz 50 / 50Ohm 4-WFBGA, FCBGA", Package="WFBGA-4 STMicroelectronics", Availability=Unavailable, MF=STMicroelectronics, MP=BALF-NRG-01D3, Price=None, SnapEDA_Link=https://www.snapeda.com/parts/BALF-NRG-01D3/STMicroelectronics/view-part/551399/?ref=snap
VD1 VD2: "Schottky Diode 60V 3A", Forward current="3 A", Reverse voltage="60 V", Footprint path 1=DIOD-SMA.Pcblib, Footprint path 2=DIOD-SMA_2.Pcblib, Library path=B360A-13-F.Schlib, Part Number=B360A-13-F
XW1 XW2: "SMB Straight Connector", LatestRevisionDate=17-Jul-2002, LatestRevisionNote="Re-released for DXP Platform.", Publisher="Altium Limited"
DA1: Footprint path 1=SOT23-5.Pcblib, Library path=LP2985IM5-1.8.Schlib, Part Number=LP2985IM5-1.8
X1: Footprint path 1=MINI-FIT-4.2-DRH-02.Pcblib, Library path=CONNECTOR-02.Schlib, Part Number=MINI-FIT-4.2-DRH-02
X2: Footprint path 1=MICRO-FIT-3.0-DRH-04.Pcblib, Library path=CONNECTOR-04.Schlib, Part Number=MICRO-FIT-3.0-DRH-04

## Free pads (board coordinates)
  round 3.5 hole 2: 3(29,30.3) 3(29,53.3) 3(73.4,28.7) 3(73.4,53.3)

## Via types
v1: diameter 0.5, hole 0.2, Top Layer to Bottom Layer, tented both sides, 194 vias

## Nets (pads, with @x,y where several pads share a name; then routed paths per layer and width w, separated by ;. In a path a pad name is that pad's centre, name@x,y a point inside that pad or via, vN(x,y) a via of type N, cw(c..) or ccw(c..) an arc to the next point about the centre after c; other vN are vias at no path point)
1V8: C8.2 C11.1 C23.1 DA1.5 DD1.8 DD4.5 R5.1 R17.2 R18.1 | length 39.9
  Top Layer w0.2: C11.1@44.608,28.308 44.616,28.3 C11.1
  Top Layer w0.25: DD1.8 44.02,29.35 44.03,29.34 44.03,28.886 44.608,28.308 44.691,28.225 44.691,27.555 44.846,27.4 51.6,27.4 53.1,28.9 53.1,30.566 53,30.666 v1(53,32.4) ; v1(47.7,37) 47.8,37 48.6,37.8 50.384,37.8 50.809,38.225 50.909,38.225 50.984,38.3 R18.1 ; v1(55.5,35.1) 55.548,35.052 55.548,34.968 C23.1@56.116,34.4 ; DD4.5 56.415,34.621 56.269,34.475 56.191,34.475 C23.1@56.116,34.4 ; R17.2 C23.1 C23.1@56.116,34.4
  Top Layer w0.35: DA1.5 C8.2 45.475,36.625 45.995,36.625 46.2,36.42 v1(46.2,36.2) 46.2,33 45.2,32 R5.1 44.608,31.992 C11.1@44.608,28.308
  Int1 (signal) w0.25: v1(53,32.4) 53.1,32.5 53.1,33.25 53.7,33.85 53.7,34.8 54,35.1 v1(55.5,35.1)
  Bottom Layer w0.25: v1(46.2,36.2) 46.6,36.2 47.358,36.958 47.658,36.958 v1(47.7,37)
5V: C1.1 C3.1 C6.1 C12.2 C15.1 DA1.1 DD1.1 DD2.16 L1.1 L2.1 R1.1 R13.2 X2.1 | length 58.4
  Top Layer w0.25: C15.1 39.05,45.4 39.55,45.9 44.322,45.9 46.597,48.175 46.775,48.175 R13.2 ; C12.2 45.684,28.3 46.088,28.704 46.088,29.34 46.098,29.35 DD1.1
  Top Layer w0.3: 42.4,36.7 42.5,36.6 R1.1 ; L1.1 48.6,36.116 48.65,36.166 48.65,36.266 49,36.616 49,37.124 49.176,37.3 50.9,37.3
  Top Layer w0.35: C12.2 45.659,28.225 45.659,28.413 45.4,28.672 45.4,31.4 46.8,32.8 46.8,36.8
  Top Layer w0.5: C15.1 38.3,45.4 36.8,43.9 33.5,43.9 32.2,42.6 32.2,40.58 33.13,39.65 33.8,38.98 33.8,37.8 34.8,36.8 C3.1 C1.1 C6.1 40.6,36.8 40.7,36.7 DA1.1 42.4,36.7 43.1,37.4 46.461,37.4 46.754,37.107 46.754,36.846 L2.1 47.508,36.108 L1.1@48.492,36.108 ; C15.1@39.05,45.4 40.265,45.4 40.53,45.135 DD2.16
Clamp: VD1.1 VD2.1 VD3.5 VT5.3 VT5.5 | length 3.8
  Top Layer w0.254: VT5.3@58.2,39.697 59.397,39.697 59.5,39.8 ; VT5.5@58.2,40.497 59.597,40.497 59.6,40.5 ; v1@75.2,39.9 75.3,39.8 ; 75.3,42.3 75.3,43.2
  other v1: 60.5,36.8 61.3,36.8 62.1,36.8 75,36.8 75.4,37.3 60.5,37.7 61.3,37.7 62.1,37.7 75,37.8 75.4,38.3 60.5,38.6 61.3,38.6 62.1,38.6 75,38.8 75.4,39.3 60.5,39.5 61.3,39.5 62.1,39.5 75,39.8 60.5,40.4 61.3,40.4 62.1,40.4 75.4,40.5 60.5,41.3 61.3,41.3 62.1,41.3 75.4,41.5 75,42.1 60.5,42.2 61.3,42.2 62.1,42.2 75.4,42.6 75,43.1 75.4,43.6 75,44.1 75.4,44.6 75,45.1 51.5,45.6 52.5,45.6 53.5,45.6 54.4,45.6 55.2,45.6 56.1,45.6 57,45.6 57.9,45.6 52.003,46.182 53.003,46.182 55.603,46.182 56.503,46.182 57.503,46.182 53.9,46.2
GND: C1.2 C3.2 C4.2 C6.2 C8.1 C9.2 C11.2 C12.1 C15.2 C17.1 C18.2 C22.1 C23.2 C24.2 C25.1 C26.2 C27.2 DA1.2 DD1.4 DD2.8 DD3.2 DD4.1 DD4.4 DD5.2 DD5.7 pad.3 R2.1 R3.1 R10.2 R14.1 R16.1 T1.A2 VT5.2 X2.2 XW1.2 XW2.2 | length 31.4
  Top Layer w0.2: v1(36.8,34.7) C3.2 ; v1(38.1,43.9) C15.2 ; v1(38.3,34.7) C1.2 ; v1(39.8,34.7) C6.2 ; v1(40,28.5) R3.1 ; R2.1 v1(40,32.1) ; v1(40.95,28.55) 40.9,28.6 40.9,29.3 C4.2 ; v1(43.1,28.2) C11.2 ; C9.2 v1(45.3,34.4) 45.3,35.1 C8.1 ; DD1.4 47.244,30.85 47.494,31.1 v1(47.5,31.1) ; C12.1 46.7,28.3 46.8,28.4 47.133,28.4 47.333,28.2 v1(47.4,28.2) ; v1(47.5,32.4) C24.2 ; v1(48.5,32.4) C22.1 ; v1(49.4,28.4) 50.084,28.4 C18.2 ; v1(49.4,31.4) C17.1 ; C26.2 v1(49.6,36.7) ; C25.1 v1(50.7,36.7) ; v1(51.6,30) 51.6,30.081 51.75,30.231 51.75,30.55 DD3.2 ; DD5.2 DD5.7 ; R14.1 54.6,34.7 54.6,34.3 ; XW2.2@54.8,32.6 54.6,32.8 54.6,34.3 ; C23.2 54.6,34.3 ; v1@58.501,38.7 VT5.2 ; v1(59.3,34.925) 59.357,34.868 59.357,34.359 R16.1 ; XW2.2@59.8,27.6 59.8,29.583 60.017,29.8 61.134,29.8 61.389,30.056 61.389,30.189 T1.A2
  Top Layer w0.3: v1(55.4,38.1) 55.4,38.059 55.475,37.984 55.475,37.545 55.52,37.5 DD4.1
  Top Layer w0.35: C3.2 C1.2 C6.2 39.875,35.375 40.175,35.375 40.475,35.675 40.975,35.675 41.05,35.75 DA1.2 ; v1(51.7,34.275) 51.741,34.275 51.791,34.225 52.375,34.225 C27.2@52.4,34.2 ; C27.2 C27.2@52.4,34.2 ; DD5.2 52.55,34.35 C27.2@52.4,34.2
  Top Layer w0.5: R10.2 v1(49.4,48.3)
  other v1: 45.5,26.7 47.3,26.7 49.5,26.7 51.3,26.7 39.6,26.8 40.9,26.8 42.3,26.8 43.8,26.8 62.225,27 63.9,27.025 65.575,27.05 67.25,27.075 52.7,27.1 68.925,27.1 70.6,27.125 62.175,28.175 48.4,28.3 42.2,28.5 62.175,29.475 62.175,30.975 41.3,31.5 42,31.5 48.5,31.7 41.3,32.3 42,32.4 27.7,33.4 30.3,33.4 40,33.7 62.05,34.775 29,34.9 60.975,35.65 62.025,35.675 44,35.7 52.1,36.225 52.95,36.25 27.7,36.5 30.3,36.5 59.175,38.3 58.5,38.7 53.25,39.05 39,39.2 50.4,39.2 39,41 44,41.275 45.325,41.275 41.1,41.3 42.5,41.3 43.975,42.5 45.325,42.525 48.3,42.7 27,43.4 28.9,43.4 34.6,45 36,45 36.8,45.7 48.6,46 27,46.7 28.9,46.7 34.6,46.8 49.4,47.5 50,47.9 34.6,48.4 27,50 28.9,50 34.6,50.3 32.9,52.3 34.8,52.3 33.9,53.3 34.8,54.4 32.9,54.5
HOT_GND: C2.2 C5.2 C7.2 C10.2 C13.2 C14.2 C16.2 C19.2 C20.2 VT5.4 VT5.6 X1.2 | length 14.8
  Top Layer w0.2: 56.8,40.1 VT5.4 ; 56.8,40.9 VT5.6
  Top Layer w0.254: C7.2@44.723,51.6 44.3,51.177 X1.2 44.7,49.3 46.3,49.3
  Top Layer w0.5: C10.2 44.723,51.6 C7.2 C2.2 C5.2
  other v1: 52.5,40.1 53.4,40.1 54.3,40.1 55.2,40.1 56.1,40.1 52.5,41 53.4,41 54.3,41 55.2,41 56.1,41 52.5,41.9 53.4,41.9 54.3,41.9 55.2,41.9 56.1,41.9 59.7,44 59.1,44.6 59.7,45.2 59.1,45.8 59.7,46.4 59.1,47 59.7,47.6 59.1,48.2 59.7,48.8 59.1,49.375 46.5,49.5 47.6,49.5 48.7,49.5 49.8,49.5 46.5,50.3 47.6,50.3 48.7,50.3 49.8,50.3
NetC2_1: C2.1 C5.1 C7.1 C10.1 R6.1 R7.1 R8.1 R9.1 VD1.2 VD2.2 X1.1
NetC4_1: C4.1 DD1.6 DD1.7 R4.2 | length 3.9
  Top Layer w0.25: C4.1 42.016,30.3 R4.2 42.066,30.35 DD1.6 ; 42.735,30.335 42.7,30.3 42.7,30 42.85,29.85 DD1.7
NetC9_1: C9.1 DA1.4 | length 1.5
  Top Layer w0.254: C9.1 43.8,34.677 43.923,34.8 DA1.4
NetC13_1: C13.1 C14.1 C16.1 C19.1 C20.1 R6.2 R7.2 R8.2 R9.2 R25.2 R26.2 R27.2 R28.2 VT1.3 VT2.3 VT3.3 VT4.3
NetC17_2: C17.2 DD3.1 R11.2 | length 2.5
  Top Layer w0.254: R11.2 49.116,30.457 49.189,30.384 C17.2@50.2,30.384 ; C17.2 50.94,30.384 51.078,30.522 51.277,30.522 51.3,30.545 DD3.1
NetC18_1: C18.1 DD3.3 R12.2 | length 4.1
  Top Layer w0.254: R12.2 51.745,29.4 52.3,29.955 DD3.3
NetC21_1: C21.1 DD4.3 R14.2 R15.1 | length 4
  Top Layer w0.25: R14.2 54.275,36.191 54.875,36.191 55.179,36.495 55.725,36.495 DD4.3
  Top Layer w0.35: R14.2 54.1,36.116 53.941,36.275 R15.1 54.684,37.484 C21.1
NetC21_2: C21.2 DD5.4 DD5.5 R15.2 VT5.1 | length 6.5
  Top Layer w0.25: 55.6,39.3 VT5.1
  Top Layer w0.35: DD5.5 52.55,37.36 52.565,37.375 DD5.4@53.185,37.375 ; DD5.4 53.215,37.265 53.215,37.875 53.816,38.475 53.916,38.475 R15.2 54.684,38.5 C21.2 54.8,38.516 55.584,39.3 55.6,39.3
NetC22_2: C22.2 DD3.5 L1.2 | length 5.8
  Top Layer w0.254: L1.2 C22.2 48.6,34.016 48.897,33.719 48.897,33.62 v1(48.944,33.573) ; v1(50.906,32.384) 51.777,31.513 51.777,31.213 DD3.5
  Bottom Layer w0.254: v1(48.944,33.573) 50.199,32.319 50.841,32.319 v1(50.906,32.384)
NetC24_1: C24.1 C27.1 DD5.3 L2.2 | length 9.2
  Top Layer w0.254: C24.1 v1(47.5,34.542) L2.2 ; v1(51.7,33.5) 51.767,33.5 52.067,33.2 52.616,33.2 53.416,34 C27.1 53.416,34.2 53.2,34.416 DD5.3
  Bottom Layer w0.254: v1(47.5,34.542) 47.842,34.2 49.5,34.2 50.2,33.5 v1(51.7,33.5)
NetC25_2: C25.2 DD5.1 R19.2 | length 2.4
  Top Layer w0.254: R19.2 C25.2 51.867,35.1 51.9,35.133 DD5.1
NetC26_1: C26.1 DD5.6 R20.2 | length 5
  Top Layer w0.254: R20.2 C26.1 49.7,35.1 49.773,35.173 49.773,35.273 50.1,35.6 51.251,35.6 51.4,35.749 51.4,36.767 51.68,37.047 51.867,37.047 51.9,37.08 DD5.6
NetDA1_3: DA1.3 R1.2 | length 1.6
  Top Layer w0.254: R1.2 41,34.677 41.123,34.8 DA1.3
NetDD1_2: DD1.2 R12.1 | length 2
  Top Layer w0.254: DD1.2 47.878,29.85 48.027,29.701 48.027,29.473 R12.1
NetDD1_3: DD1.3 R11.1 | length 1.8
  Top Layer w0.254: DD1.3 48.027,30.35 48.1,30.423 R11.1
NetDD1_5: DD1.5 R5.2 | length 2.4
  Top Layer w0.2: R5.2 43.535,31.951 43.201,31.951 42.8,31.549 42.8,31 42.923,30.877 43.568,30.877 DD1.5
NetDD2_5: DD2.5 R21.1 | length 35.7
  Top Layer w0.254: R21.1 v1(70.4,34.2)
  Top Layer w0.3: DD2.5 45.61,40.185 45.76,40.335 45.835,40.335 v1(47.5,42)
  Int1 (signal) w0.2: v1(47.5,42) 47.55,41.95 47.55,41.45 48,41 50.2,41 51.8,42.6 60,42.6 60.5,43.1 67.4,43.1 70.4,40.1 v1(70.4,34.2)
NetDD2_6: DD2.6 R22.1 | length 27.3
  Top Layer w0.254: R22.1 v1(70.4,41)
  Top Layer w0.3: DD2.6 46.88,40.185 47.03,40.335 47.035,40.335 v1(48.3,41.6)
  Int1 (signal) w0.2: v1(48.3,41.6) 50.3,41.6 51.65,42.95 59.855,42.95 60.405,43.5 67.6,43.5 70.061,41.039 70.361,41.039 v1(70.4,41)
NetDD2_7: DD2.7 R23.1 | length 33.2
  Top Layer w0.254: R23.1 v1(70.5,47.7)
  Top Layer w0.3: DD2.7 48.3,39.65 48.3,40.6 49.3,41.6 v1(49.3,42.2)
  Int1 (signal) w0.25: v1(49.3,42.2) 50.3,43.2 50.3,46 51.2,46.9 58,46.9 58.3,47.2 58.3,48 58.4,48.1 58.4,49.5 58.9,50 68.1,50 68.3,49.8 68.3,48.9 68.7,48.5 70.3,48.5 70.475,48.325 70.475,47.725 v1(70.5,47.7)
NetDD2_9: DD2.9 R24.1 | length 30.1
  Top Layer w0.254: R24.1 v1(70.4,54.5)
  Top Layer w0.3: DD2.9 49.42,45.82 v1(49.8,46.2)
  Int1 (signal) w0.25: v1(49.8,46.2) 50.9,47.3 57.754,47.3 57.9,47.446 57.9,49.566 58.734,50.4 68.154,50.4 68.3,50.546 68.3,52.254 68.446,52.4 69.954,52.4 70.4,52.846 v1(70.4,54.5)
NetDD2_12: DD2.12 R10.1 | length 4.1
  Top Layer w0.3: DD2.12 45.61,45.135 46.468,45.993 47.342,45.993 48.15,46.8 R10.1
NetDD2_13: DD2.13 R13.1 | length 3.9
  Top Layer w0.3: DD2.13 44.34,45.135 44.49,45.285 44.585,45.285 46.1,46.8 R13.1
NetDD3_4: DD3.4 R19.1 | length 2.7
  Top Layer w0.254: R19.1 50.773,32.911 51.165,32.911 52.3,31.776 DD3.4
NetDD3_6: DD3.6 R20.1 | length 2.7
  Top Layer w0.254: R20.1 49.632,32.968 49.632,32.568 50.3,31.9 50.645,31.9 51.277,31.268 51.3,31.245 DD3.6
NetDD4_2: DD4.2 R18.2 | length 4.9
  Top Layer w0.25: R18.2 v1(52.7,38.4) ; v1(54.8,36.9) 54.868,36.9 54.968,37 DD4.2 DD4.2@55.725,37.005
  Bottom Layer w0.25: v1(52.7,38.4) 52.7,37.5 53.3,36.9 v1@54.732,36.9
NetDD4_8: DD4.8 R16.2 R17.1 | length 1.7
  Top Layer w0.25: DD4.8 57.915,34.515 57.8,34.4 R17.1 R16.2
NetR2_2: R2.2 R3.2 R4.1 XW1.1 | length 5.7
  Top Layer w0.489: XW1.1 40.1,30.3 40.2,30.4 R4.1
NetR21_2: R21.2 R25.1 VT1.1 | length 3.2
  Top Layer w0.254: R25.1 R21.2 68.223,34.077 68.223,33.547 69.02,32.75 VT1.1
NetR22_2: R22.2 R26.1 VT2.1 | length 3.2
  Top Layer w0.254: R26.1 R22.2 68.321,40.879 68.321,40.219 69.02,39.52 VT2.1
NetR23_2: R23.2 R27.1 VT3.1 | length 3.2
  Top Layer w0.254: R27.1 R23.2 68.323,47.577 68.323,46.947 69.02,46.25 VT3.1
NetR24_2: R24.2 R28.1 VT4.1 | length 3.1
  Top Layer w0.254: R28.1 R24.2 68.123,54.377 68.123,53.937 69.02,53.04 VT4.1
NetT1_A1: T1.A1 XW2.1 | length 3.7
  Top Layer w0.254: XW2.1 57.4,30.2 T1.A1
NetVD3_1: VD3.1 VT4.2
NetVD3_2: VD3.2 VT3.2
NetVD3_3: VD3.3 VT2.2
NetVD3_4: VD3.4 VT1.2
OUT_N: DD4.12 T1.B2 | length 8.2
  Top Layer w0.15: DD4.12 58.655,37.445 59.254,37.445 59.675,37.024 59.675,36.199 59.8,36.074 59.8,35.712 61.838,33.674 61.838,31.943 61.42,31.524 61.42,31.22 T1.B2
OUT_P: DD4.11 T1.B1 | length 7.6
  Top Layer w0.15: DD4.11 58.633,37.033 59.167,37.033 59.375,36.825 59.375,36.075 59.5,35.95 59.5,35.588 61.538,33.549 61.538,32.067 61.02,31.548 61.02,31.22 T1.B1
SEL1: DD2.15 X2.3 | length 9.4
  Top Layer w0.2: X2.3 34.93,43.15 41.185,43.15 41.8,43.765 DD2.15
SEL2: DD2.14 X2.4 | length 7.7
  Top Layer w0.2: X2.4 36.911,42 37.611,42.7 42.005,42.7 43.07,43.765 DD2.14
pads on no net: DD2.1 DD2.2 DD2.3 DD2.4 DD2.10 DD2.11 DD4.6 DD4.7 DD4.9 DD4.10 DD4.13 DD4.14 DD4.15 DD4.16 DD4.17 DD4.18 DD4.19 DD4.20 DD4.21 DD4.22 X1.3 X2.5

## Polygon pours and split planes (outlines as drawn)
GND on Top Layer "GND_L01_P033" (solid, pour order 33): 26.2,55.7 36.3,55.7 36.3,46.3 44.1,46.3 46.6,48.8 50.5,48.8 50.5,39.5 58,39.5 58.2,39.3 59.1,39.3 59.9,38.5 59.8,38.4 59.8,36.075 62.6,36.075 62.6,27.9 71.5,27.9 71.5,30.1 72.8,31.4 76,31.4 76,26 26.2,26
HOT_GND on Top Layer "HOT_GND_L01_P026" (solid, pour order 26): 44.1,46.5 45.9,48.3 45.9,48.9 50.6,48.9 50.6,52.2 41.5,52.2 41.5,46.5
HOT_GND on Top Layer "HOT_GND_L01_P017" (solid, pour order 17): 57.305,39.6 52,39.6 52,43.1 57.3,43.1 58.6,44.4 58.6,49.7 61.209,49.7 61.2,42.9 59.6,42.9 59.6,41.292 57.305,41.3
no net on Top Layer "NONET_L01_P019" (solid, pour order 19): 63,27
Clamp on Top Layer "CLAMP_L01_P018" (solid, pour order 18): 58,43.4 58.2,43.6 58.2,46.6 51.1,46.6 51.1,43.4
NetC2_1 on Top Layer "NETC2_1_L01_P000" (solid, pour order 0): 51.1,47.1 58.2,47.1 58.2,50.2 61.7,50.2 61.7,52.1 52.9,52.1 52.9,55.7 36.5,55.7 36.5,46.5 41.1,46.5 41.1,52.9 51.1,52.9
Clamp on Top Layer "CLAMP_L01_P016" (solid, pour order 16): 62.6,42.6 62.6,36.3 60,36.3 60,38.7 59.1,39.6 59.1,41.1 60,41.1 60,42.6
NetVD3_4 on Top Layer "NETVD3_4_L01_P001" (solid, pour order 1): 68.2,28.2 71.3,28.2 71.3,30.1 74.4,33.2 74.4,39.9 72.7,39.9 72.7,35.2 70.3,32.8 70.3,32.2 68.2,32.2
NetC13_1 on Top Layer "NETC13_1_L01_P008" (solid, pour order 8): 53.2,55.6 65.8,55.6 65.8,28.5 62.9,28.5 62.9,42.9 61.9,42.9 61.9,52.8 53.2,52.8
Clamp on Top Layer "CLAMP_L01_P005" (solid, pour order 5): 74.6,36 74.6,45.7 75.8,45.7 75.8,36
NetVD3_1 on Top Layer "NETVD3_1_L01_P004" (solid, pour order 4): 74.4,42 74.4,48.9 71.2,52.1 68.6,52.1 68.6,48.9 71.8,48.9 72.7,48 72.7,42
NetVD3_2 on Top Layer "NETVD3_2_L01_P003" (solid, pour order 3): 74.3,41.1 71,41.1 71,42.1 68.5,42.1 68.5,45.4 68.6,45.5 72.3,45.5 72.3,41.7 74.4,41.7
NetVD3_3 on Top Layer "NETVD3_3_L01_P002" (solid, pour order 2): 72.3,35.4 72.3,40.1 74.3,40.1 74.4,40.2 74.4,40.8 71,40.8 71,38.8 70.9,38.7 68.5,38.7 68.5,35.4
GND on Bottom Layer "GND_L04_P035" (solid, pour order 35): 26,56 36.4,56 36.3,55.9 36.3,46.3 44.3,46.3 46.6,48.6 50.4,48.6 50.4,39.4 59.8,39.4 59.8,36.1 62.6,36.1 62.6,27.9 71.5,27.9 71.5,31.3 76,31.3 76,26 26,26
HOT_GND on Bottom Layer "HOT_GND_L04_P025" (solid, pour order 25): 50.6,39.6 60,39.6 60.1,39.7 60.1,43.5 61.9,43.5 61.9,55.7 36.5,55.7 36.5,46.5 44.2,46.5 45.7,48 45.7,48.9 46.1,48.9 50.6,48.9
GND on Bottom Layer "NONET_L04_P031" (solid, shelved, pour order 31): 26.4,45.5 26.5,45.4 35.8,45.4 36.6,46.2 36.9,46.2 36.8,46.3 44.3,46.3 46.5,48.5 50.3,48.5 50.4,48.6 50.4,39.4 59.8,39.4 59.8,34.3 62.6,34.3 62.6,27.9 71.5,27.9 71.5,31.3 75.7,31.3 75.7,26.3 26.2,26.3
HOT_GND on Bottom Layer "HOT_GND_L04_P024" (solid, pour order 24): 58.7,40.8 56.4,43.1 56,43.1
Clamp on Bottom Layer "CLAMP_L04_P021" (solid, pour order 21): 51.1,46.6 51.1,43.5 56.8,43.5 59.2,41.1 62.8,41.1 62.8,43.4 62.7,43.5 59.1,43.5 58.4,44.2 58.4,46.6
Clamp on Bottom Layer "CLAMP_L04_P020" (solid, pour order 20): 75.8,31.5 71.3,31.5 71.3,28.1 62.8,28.1 62.8,36.3 60,36.3 60,42.6 61.9,42.6 61.9,53.4 71,53.4 71,52.3 72.35,50.95 75.8,50.95 75.8,47.5
GND on Int1 (signal) "GND_L02_P034" (solid, pour order 34): 26,26 62.5,26 62.5,35.9 62.6,36 62.5,36.1 59.9,36.1 59.9,38.6 59,39.5 50.5,39.5 50.5,48.8 46.5,48.8 44.1,46.4 36.3,46.4 36.3,53.1 71,53.1 71,52.3 72.4,50.9 76,50.9 76,56 26,56
GND on Int2 (GND) (split plane): 75.49,50.951 72.421,50.951 72.136,51.236 71.051,52.321 71.051,53 71.047,53.02 71.036,53.036 71.02,53.047 71,53.051 36.5,53.051 36.48,53.047 36.464,53.036 36.453,53.02 36.449,53 36.453,52.98 36.457,52.975 36.453,52.969 36.449,52.949 36.449,46.5 36.453,46.48 36.464,46.464 36.48,46.453 36.5,46.449 44.1,46.449 44.12,46.453 44.136,46.464 44.436,46.764 46.236,48.564 46.521,48.849 50.549,48.849 50.549,39.6 50.553,39.58 50.564,39.564 50.58,39.553 50.6,39.549 59.079,39.549 59.949,38.679 59.949,36.3 59.953,36.28 59.964,36.264 59.98,36.253 60,36.249 62.749,36.249 62.749,28.1 62.753,28.08 62.764,28.064 62.78,28.053 62.8,28.049 71.3,28.049 71.32,28.053 71.336,28.064 71.347,28.08 71.351,28.1 71.351,30.079 72.336,31.064 72.721,31.449 75.49,31.449 75.49,26.51 26.51,26.51 26.51,55.49 75.49,55.49
HOT_GND on Int2 (GND) (split plane): 70.949,52.3 70.953,52.28 70.964,52.264 72.064,51.164 72.364,50.864 72.374,50.857 72.38,50.853 72.4,50.849 75.49,50.849 75.49,31.551 72.7,31.551 72.68,31.547 72.664,31.536 72.264,31.136 71.264,30.136 71.253,30.12 71.249,30.1 71.249,28.151 62.851,28.151 62.851,36.3 62.847,36.32 62.836,36.336 62.82,36.347 62.8,36.351 60.051,36.351 60.051,38.7 60.047,38.72 60.043,38.726 60.036,38.736 59.136,39.636 59.12,39.647 59.1,39.651 50.651,39.651 50.651,48.9 50.647,48.92 50.636,48.936 50.62,48.947 50.6,48.951 46.5,48.951 46.48,48.947 46.464,48.936 46.164,48.636 44.364,46.836 44.079,46.551 36.551,46.551 36.551,52.949 70.949,52.949

## Other copper
Bottom Layer:
  pour cut-out: 51,39.5
Int2 (GND) (plane layer: these items are gaps in the copper):
  lines w0.1: 36.5,52.949 36.5,46.5 44.1,46.5 44.4,46.8 46.2,48.6 46.5,48.9 50.6,48.9 50.6,39.6 59.1,39.6 60,38.7 60,36.3 62.8,36.3 62.8,28.1 71.3,28.1 71.3,30.1 ; 36.5,53 41.5,53 71,53 71,52.3 72.1,51.2 72.4,50.9 76,50.9 ; 76,31.5 72.7,31.5 72.3,31.1 ; 71.3,30.1 72.3,31.1 ; 71.3,30.1 71.3,30.1 ; 72.3,31.1 72.3,31.1

## Silkscreen, mask and mechanical layers (free items; w line width, h text height)
Top Overlay:
  text "R6-R9" at 52.9,50.8 h1 r90
Mechanical 4:
  the board outline again, w0.3

## Dimensions
28.2,26 to 29.3,56 on Mechanical 1
26,27.8 to 76,27.8 on Mechanical 1